# Altium PCB PCB01.PcbDoc
Units mil, origin at the board's own origin, x right, y up, seen from the top; angles counter-clockwise.
Board outline 3937.01 x 3937.01 mil, 4 copper layers (L1, L2, L3, L4), stack 61.855 mil thick; 75 components, 50 nets, 150 pads, 78 vias.
Unrouted connection lines stored in the file: 3.
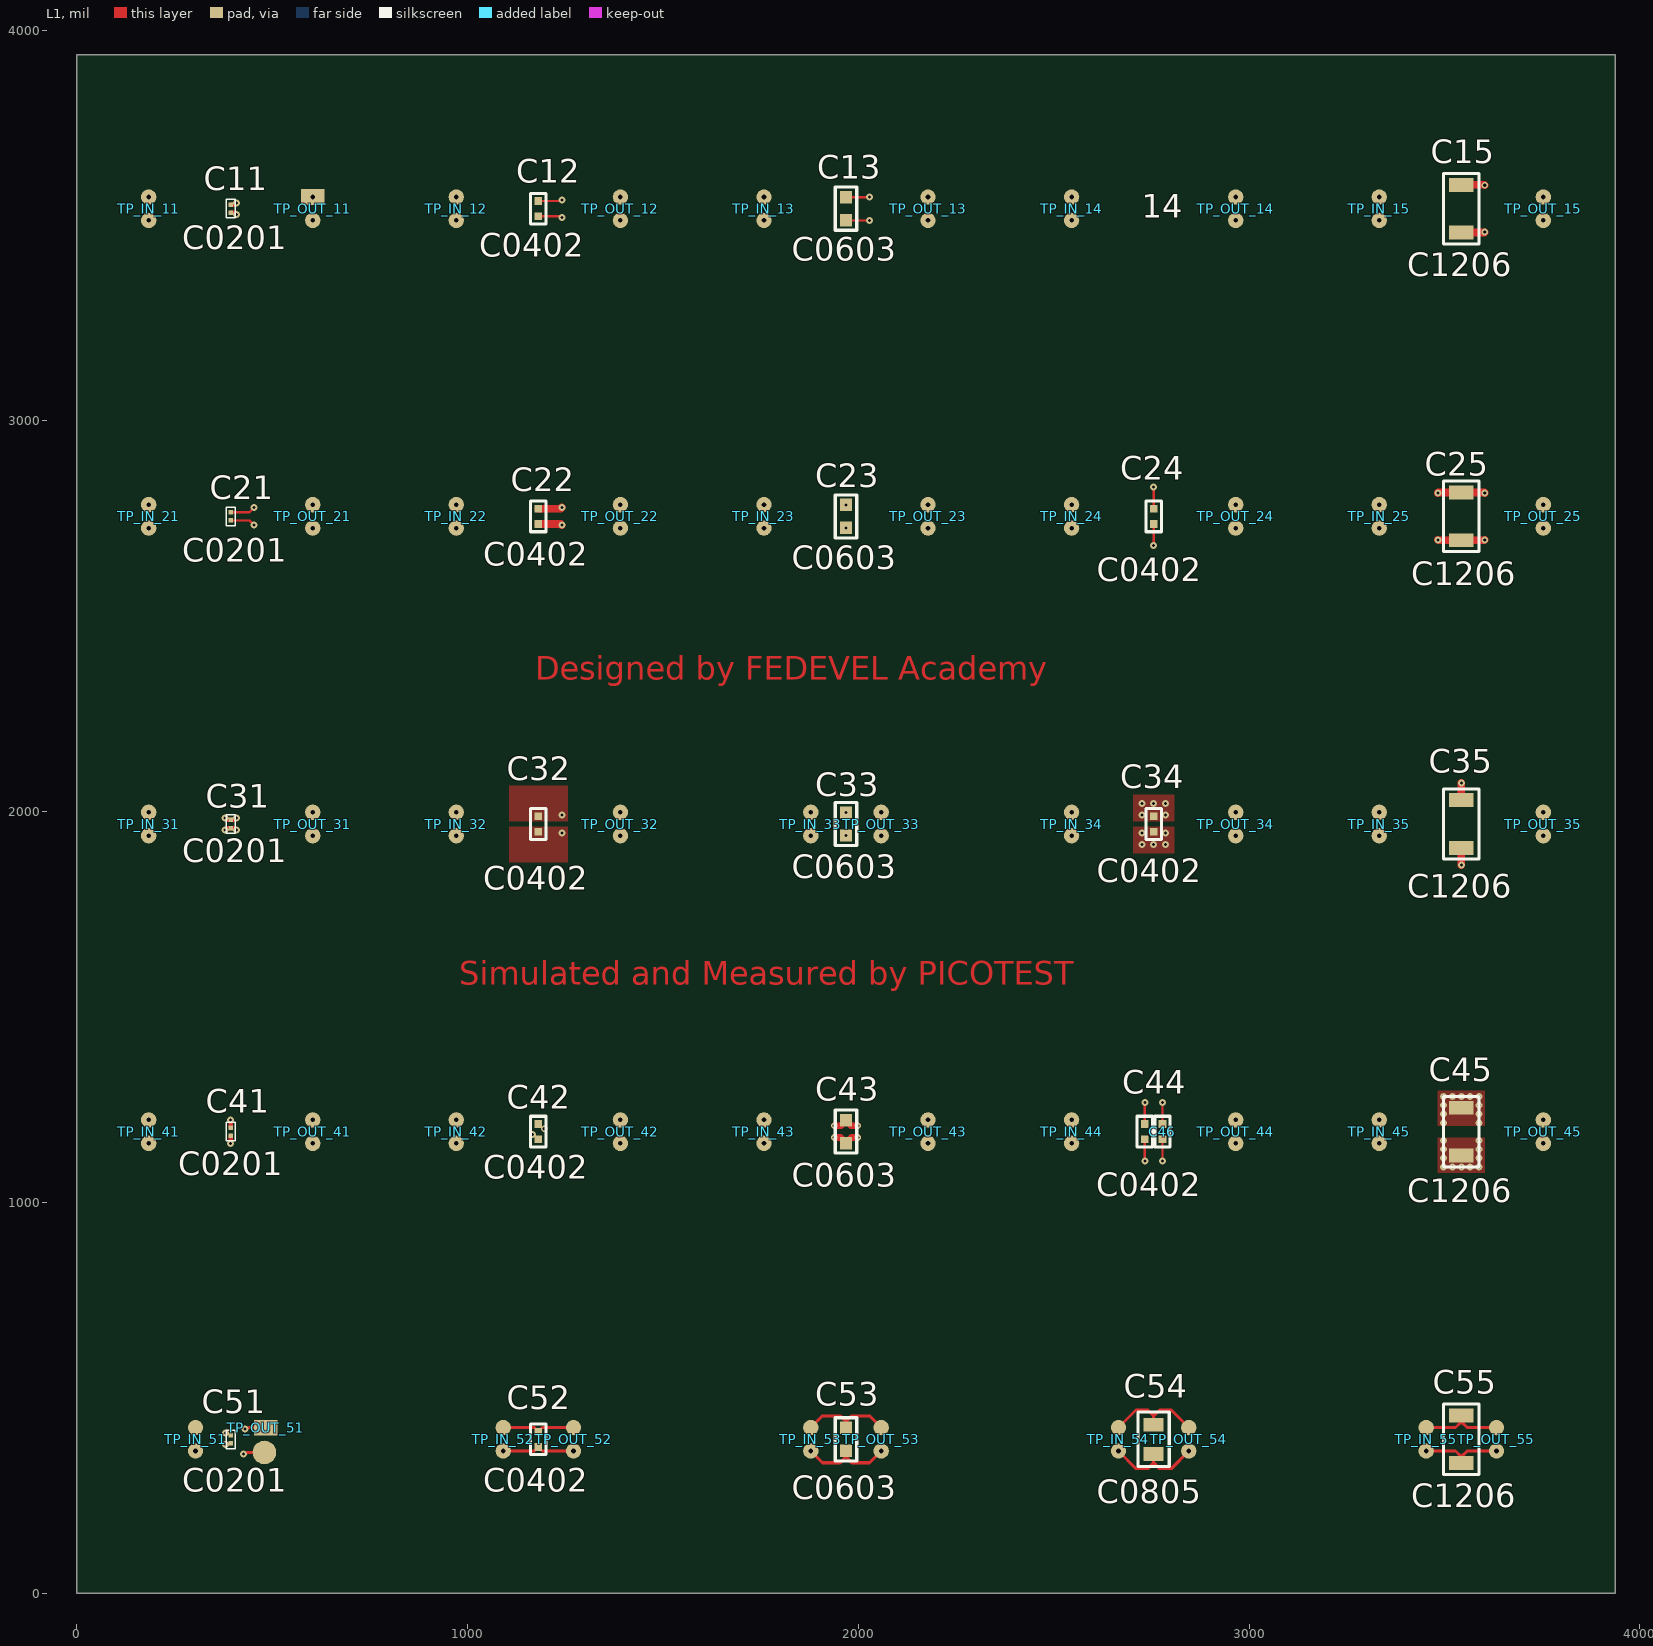
[diagram p0: L1 view]
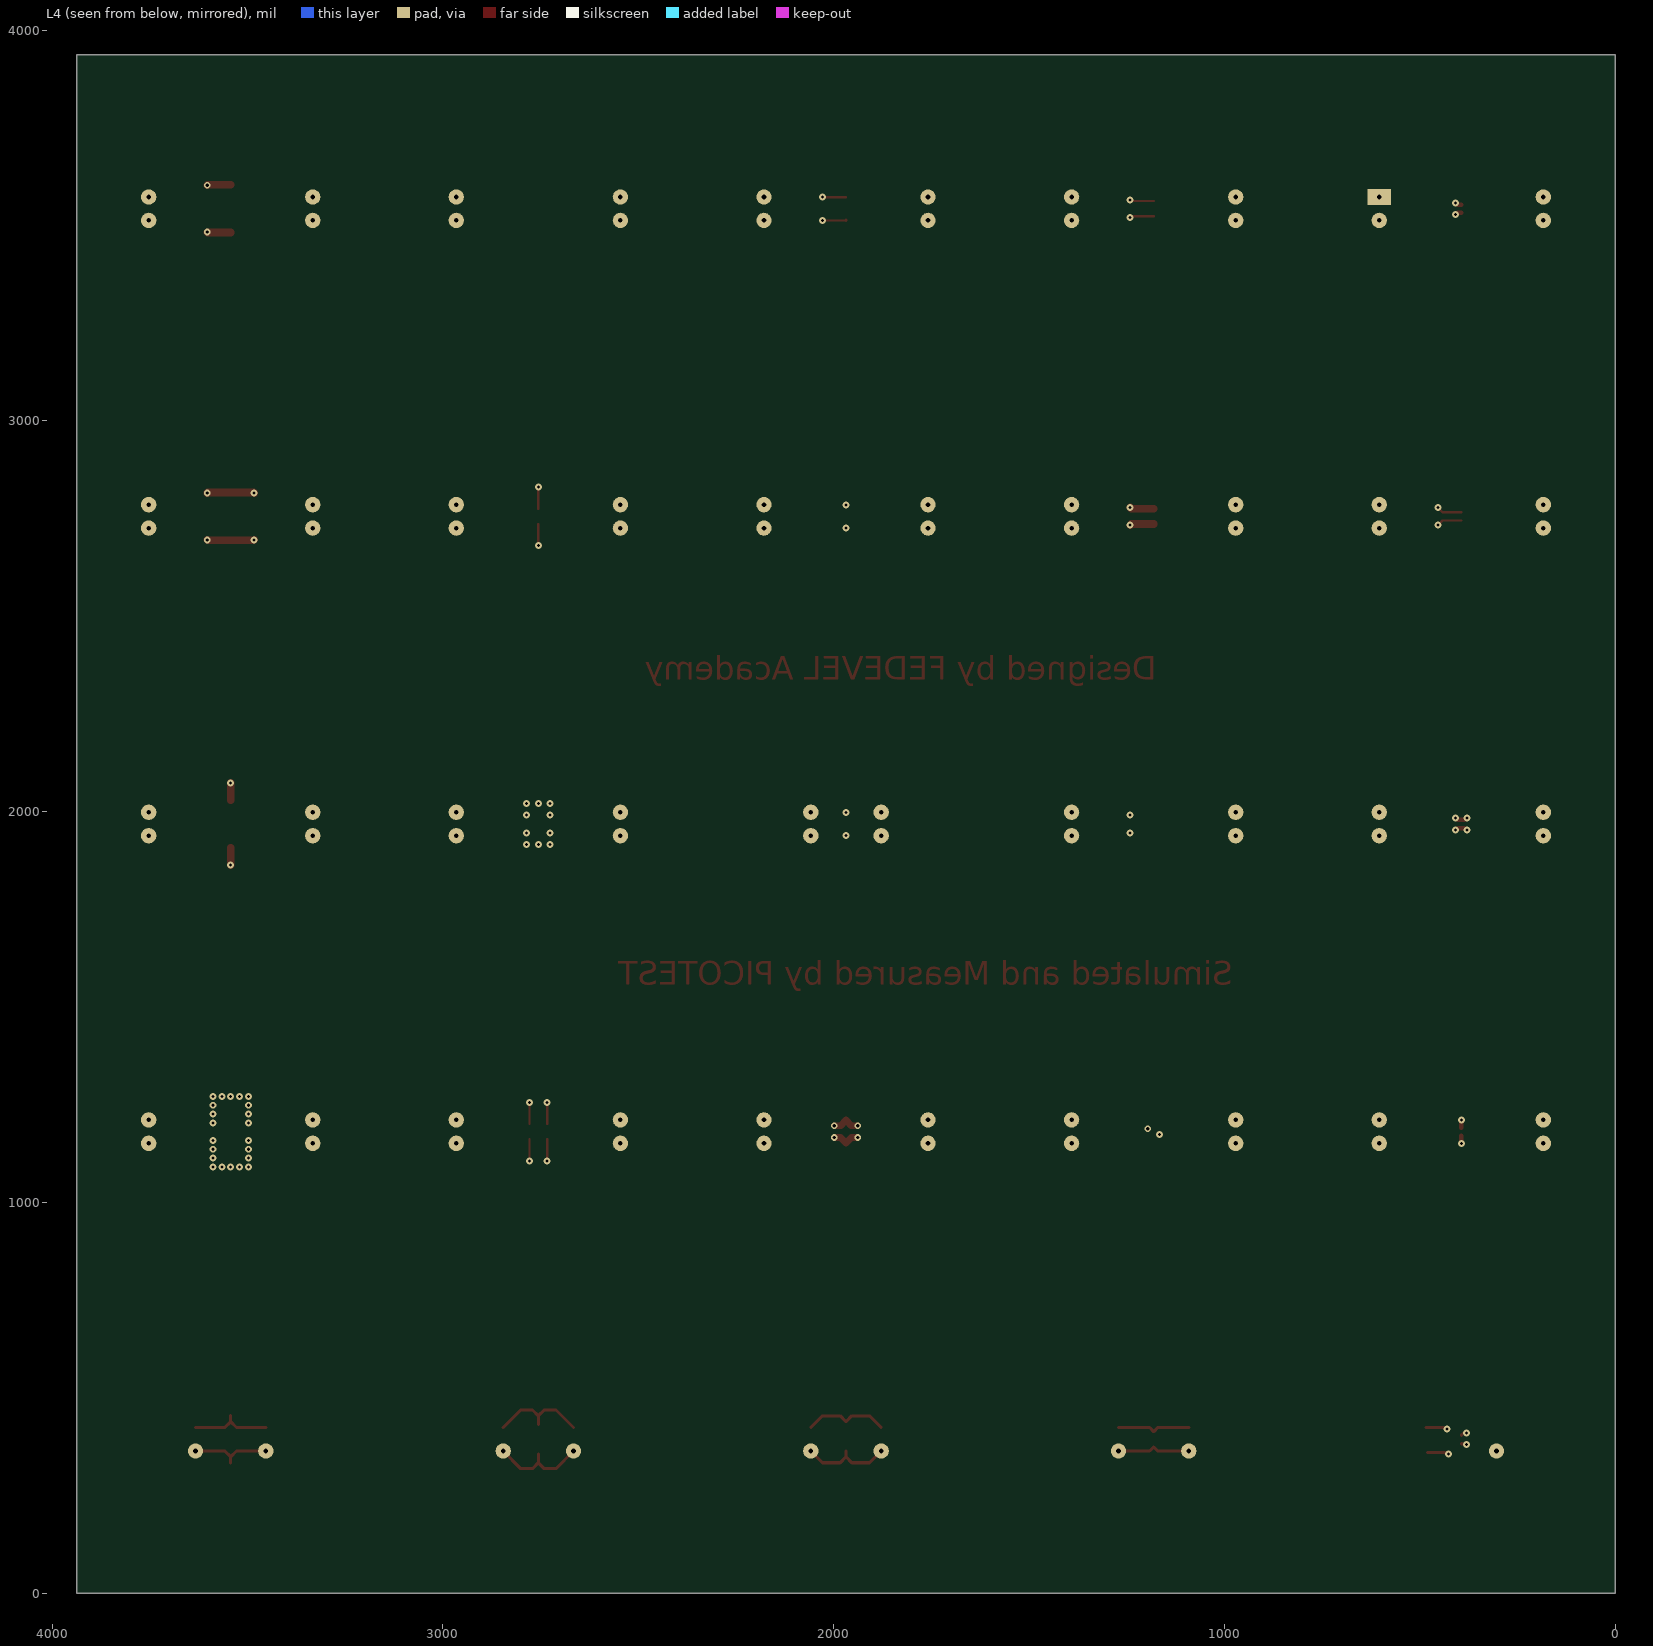
[diagram p1: L4 view, seen from below]
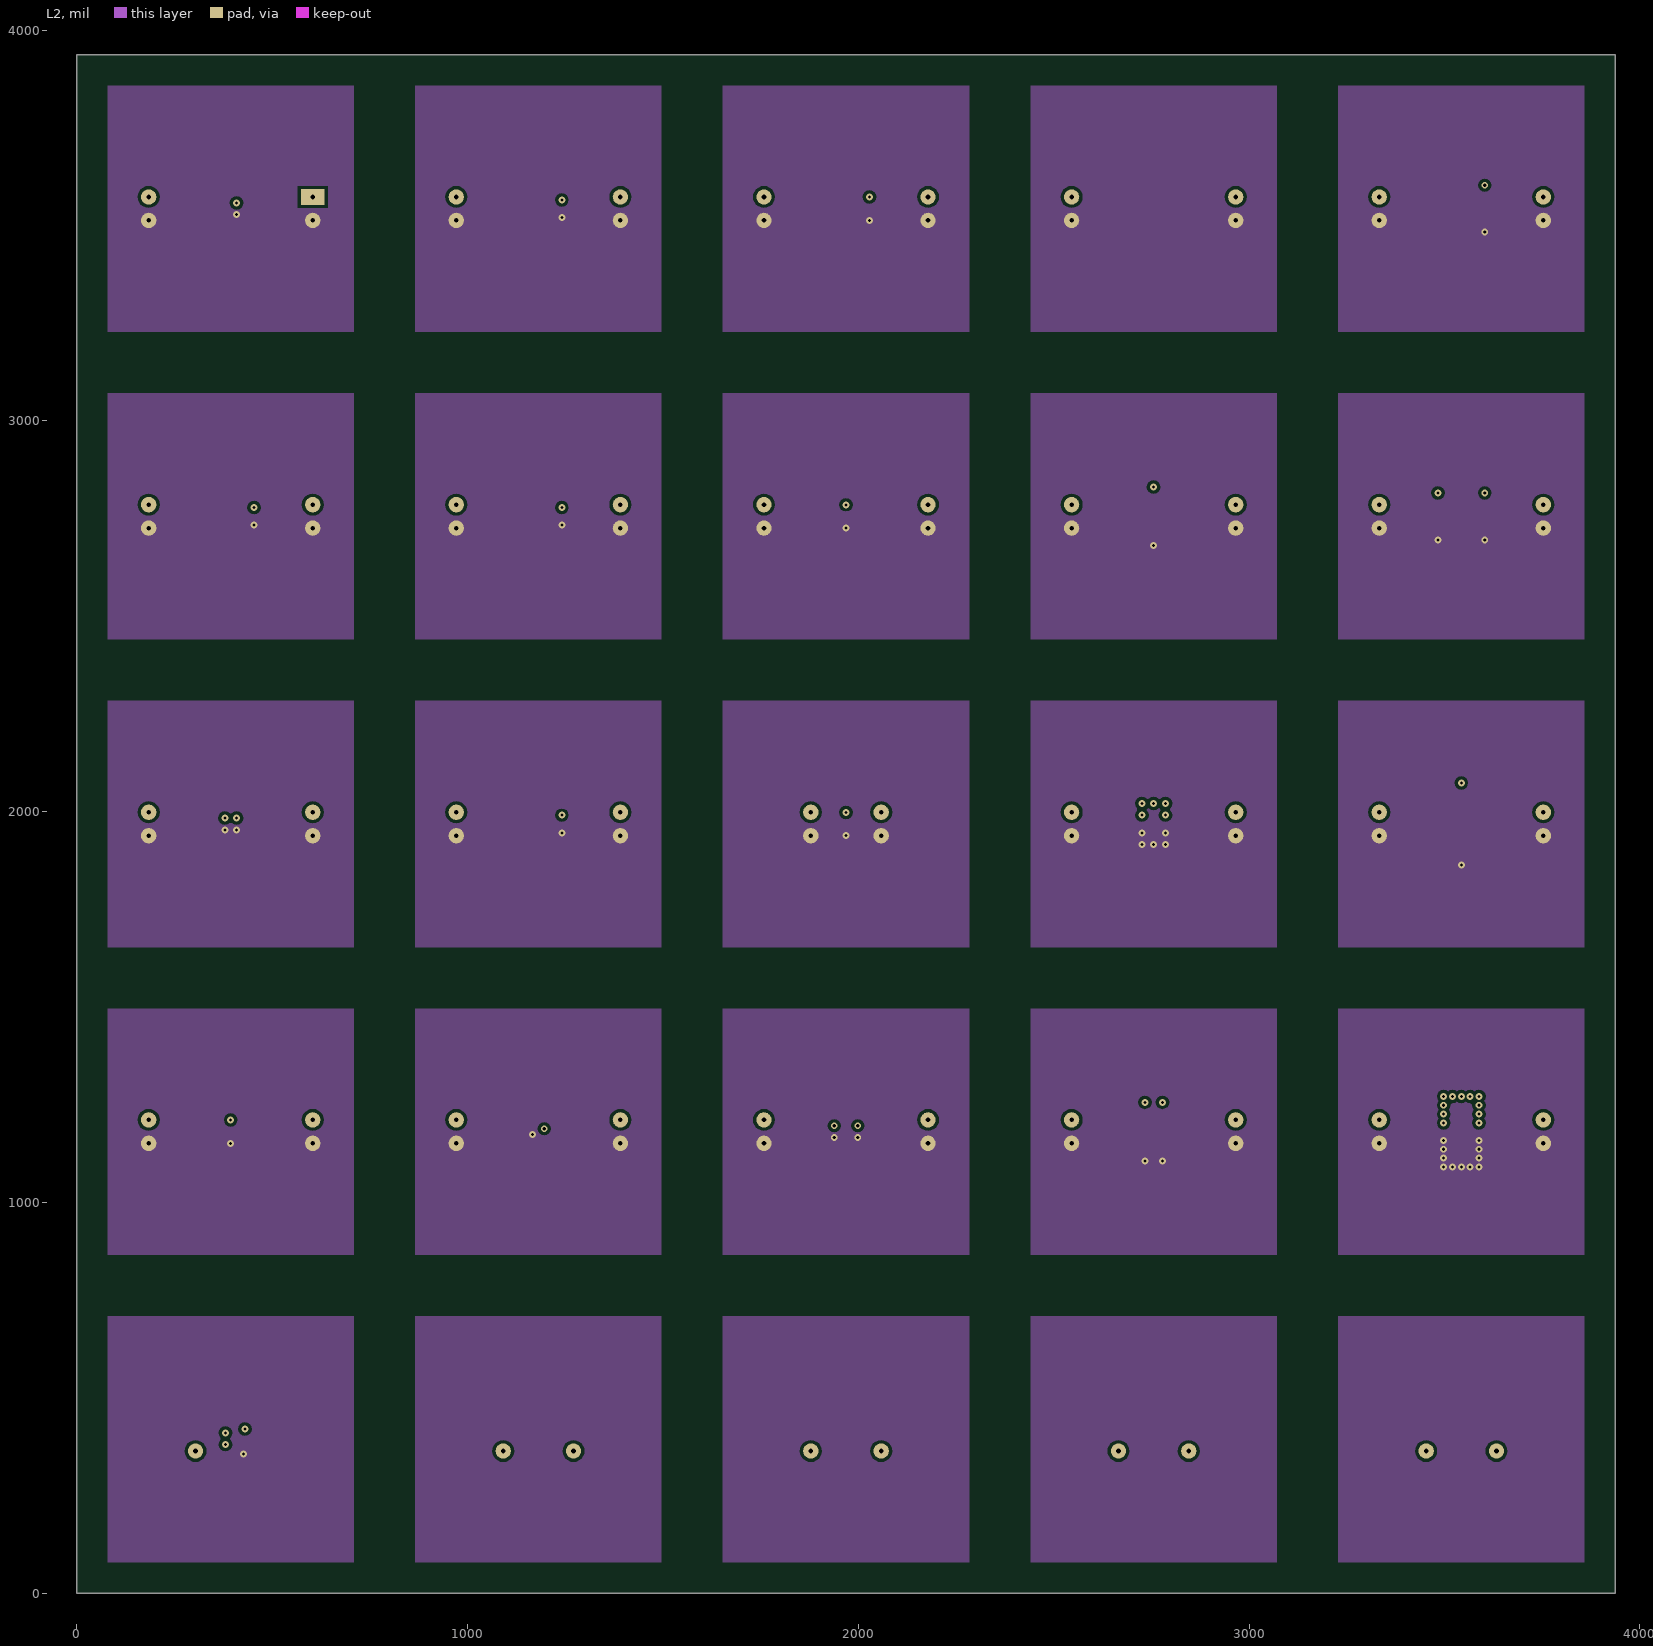
[diagram p2: L2]
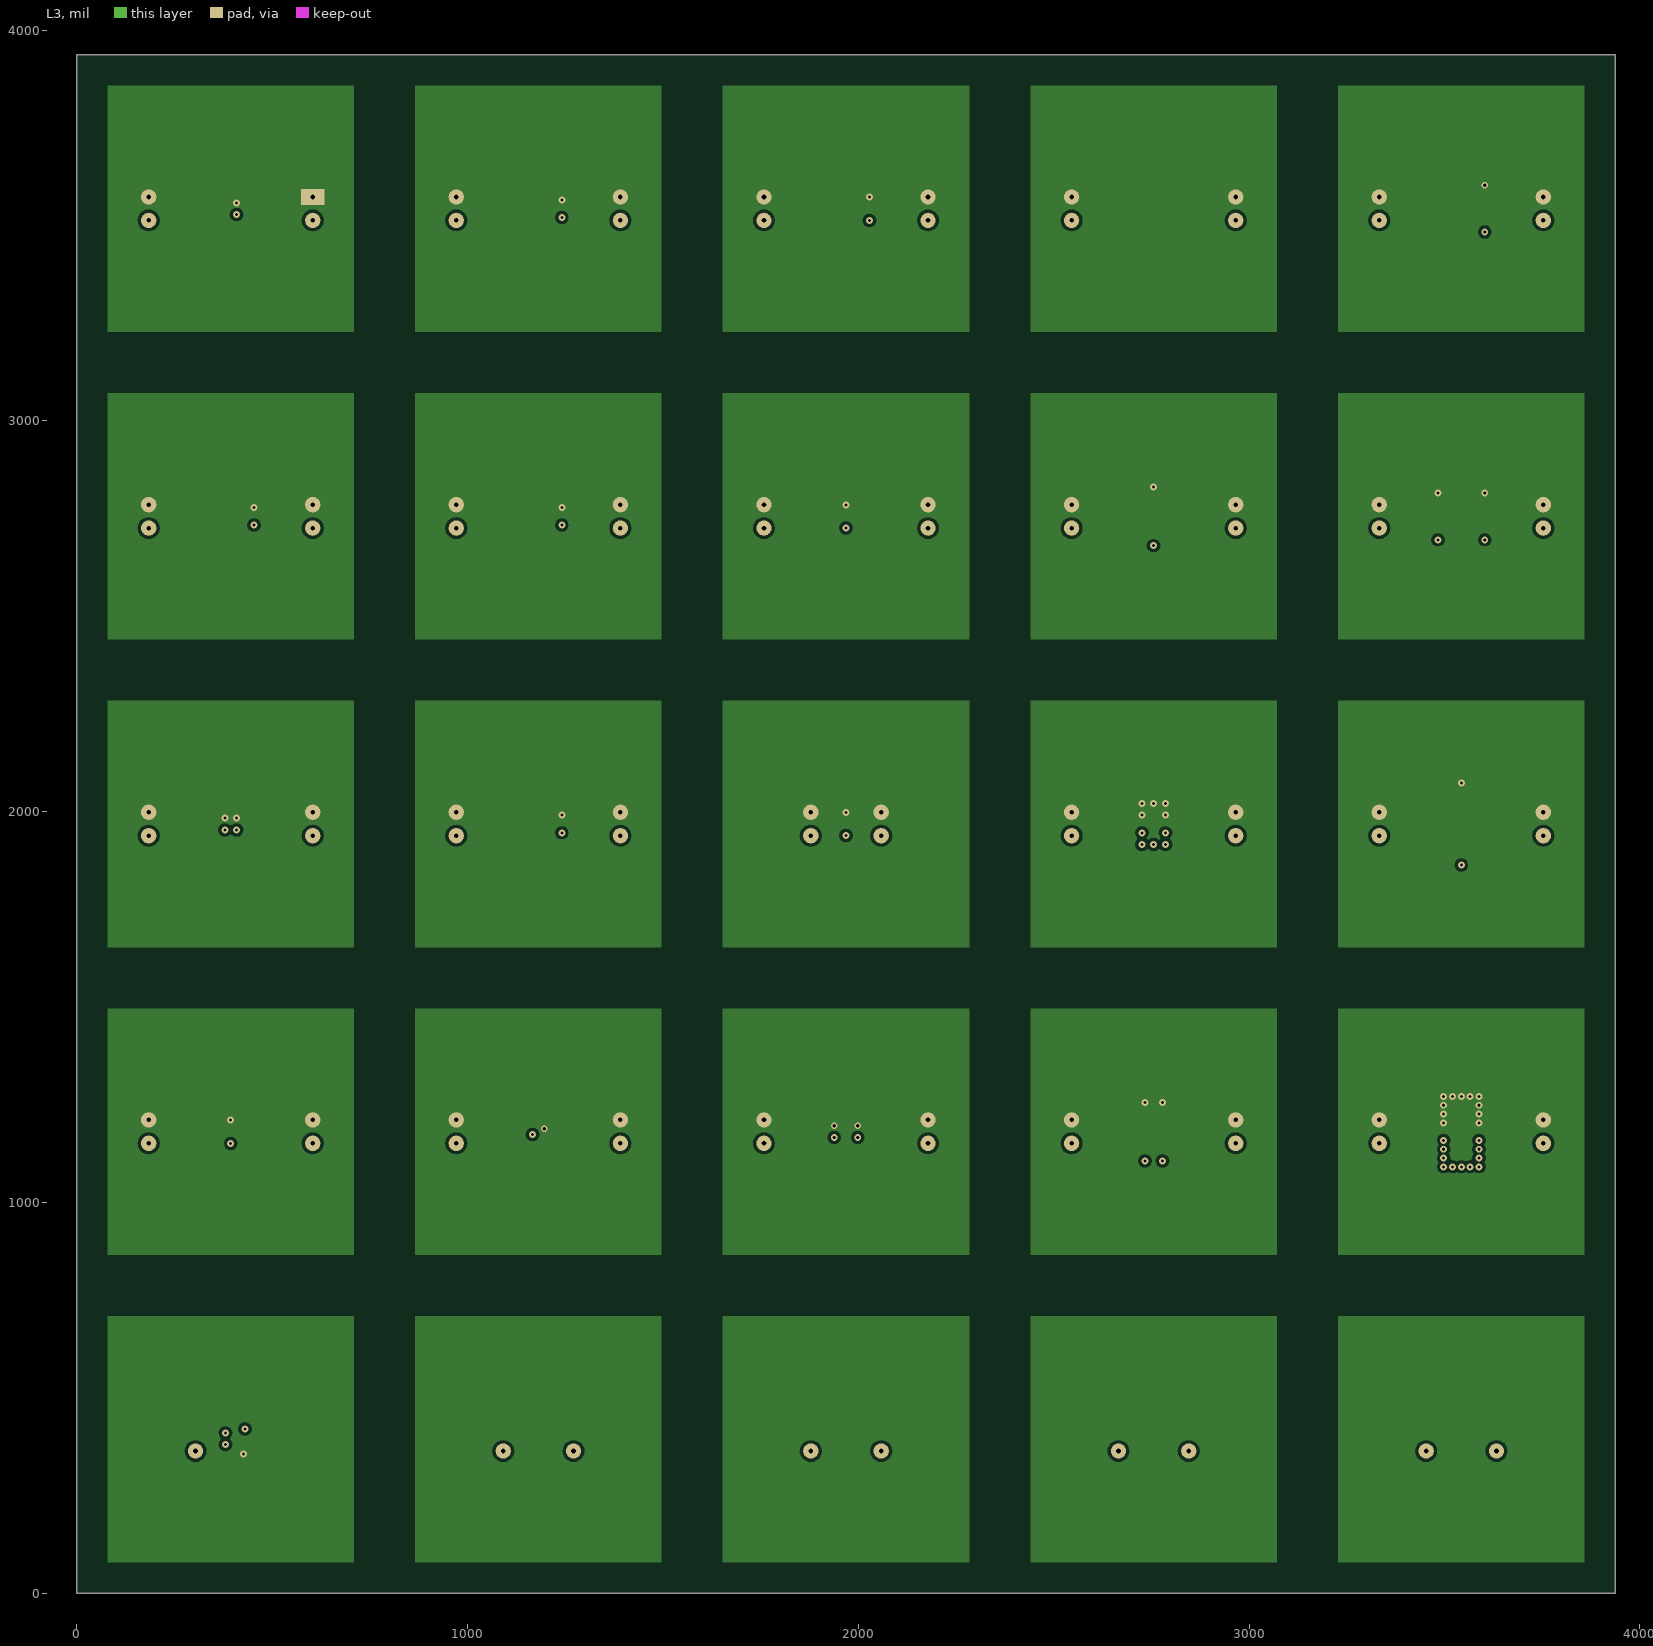
[diagram p3: L3]

## Layer stack, top to bottom
Top Solder: solder mask 0.5, Solder Resist, Dk 3.8
L1: signal copper 1.4
Dielectric 2: prepreg 3.937, 2313, Dk 4.05
L2: signal copper 0.689
Dielectric 1: dielectric 49.8031, FR-4, Dk 4.8
L3: signal copper 0.689
Dielectric 3: prepreg 3.937, 2313, Dk 4.05
L4: signal copper 1.4
Bottom Solder: solder mask 0.5, Solder Resist, Dk 3.8

## Board outline
0,0 3937.01,0 3937.01,3937.01 0,3937.01

## Design rules (kind name [scope] priority, off if disabled: settings)
Clearance [All] p1: gap=7.87 ignorepadtopadclearanceinfootprint=FALSE
HoleSize [All] p1: absolutevalues=TRUE maxlimit=250 minlimit=7.87 maxpercent=80.000 minpercent=20.000
MinimumSolderMaskSliver [All] p1: minsoldermaskwidth=7.87
PolygonConnect [All] p1: connectstyle=Direct reliefconductorwidth=10 reliefentries=4 polygonreliefangle="90 Angle" airgapwidth=10
RoutingVias [All] p1: holewidth=11.81 width=23.62 viastyle="Through Hole" minholewidth=7.87 minwidth=17.72 maxholewidth=250 maxwidth=393.7
SolderMaskExpansion [All] p1: expansion=1.97 istentingtop=FALSE
Width [All] p1: maxlimit=393.7 minlimit=5.91 preferedwidth=5.91
28 further rules are at their usual default settings.

## Components (designator, comment, footprint, x,y, rotation, side; value= is the part's Value field where it differs from the comment)
C11 "C0201" C0201 393.7,3543.31 r270 top
C12 "C0402" C0402 1181.1,3543.31 r270 top
C13 "C0603" C0603 1968.5,3543.31 r270 top
C15 "C1206" C1206 3543.31,3543.31 r270 top
C21 "C0201" C0201 393.7,2755.91 r270 top
C22 "C0402" C0402 1181.1,2755.91 r270 top
C23 "C0603" C0603 1968.5,2755.91 r270 top
C24 "C0402" C0402 2755.91,2755.91 r270 top
C25 "C1206" C1206 3543.31,2755.91 r270 top
C31 "C0201" C0201 393.7,1968.5 r270 top
C32 "C0402" C0402 1181.1,1968.5 r270 top
C33 "C0603" C0603 1968.5,1968.5 r270 top
C34 "C0402" C0402 2755.91,1968.5 r270 top
C35 "C1206" C1206 3543.31,1968.5 r270 top
C41 "C0201" C0201 393.7,1181.1 r270 top
C42 "C0402" C0402 1181.1,1181.1 r270 top
C43 "C0603" C0603 1968.5,1181.1 r270 top
C44 "C0402" C0402 2733.41,1181.1 r270 top
C45 "C1206" C1206 3543.31,1181.1 r270 top
C46 "C0402" C0402 2778.41,1181.1 r270 top
C51 "C0201" C0201 393.7,393.7 r270 top
C52 "C0402" C0402 1181.1,393.7 r270 top
C53 "C0603" C0603 1968.5,393.7 r270 top
C54 "C0805" C0805 2755.91,393.7 r270 top
C55 "C1206" C1206 3543.31,393.7 r270 top
TP_IN_11 "TH-TH" TP_TH_TH#1 183.7,3543.31 r0 top
TP_IN_12 "TH-TH" TP_TH_TH#1 971.1,3543.31 r0 top
TP_IN_13 "TH-TH" TP_TH_TH#1 1758.5,3543.31 r0 top
TP_IN_14 "TH-TH" TP_TH_TH#1 2545.91,3543.31 r0 top
TP_IN_15 "TH-TH" TP_TH_TH#1 3333.31,3543.31 r0 top
TP_IN_21 "TH-TH" TP_TH_TH#1 183.7,2755.91 r0 top
TP_IN_22 "TH-TH" TP_TH_TH#1 971.1,2755.91 r0 top
TP_IN_23 "TH-TH" TP_TH_TH#1 1758.5,2755.91 r0 top
TP_IN_24 "TH-TH" TP_TH_TH#1 2545.91,2755.91 r0 top
TP_IN_25 "TH-TH" TP_TH_TH#1 3333.31,2755.91 r0 top
TP_IN_31 "TH-TH" TP_TH_TH#1 183.7,1968.5 r0 top
TP_IN_32 "TH-TH" TP_TH_TH#1 971.1,1968.5 r0 top
TP_IN_33 "TH-TH" TP_TH_TH#1 1878.5,1968.5 r0 top
TP_IN_34 "TH-TH" TP_TH_TH#1 2545.91,1968.5 r0 top
TP_IN_35 "TH-TH" TP_TH_TH#1 3333.31,1968.5 r0 top
TP_IN_41 "TH-TH" TP_TH_TH#1 183.7,1181.1 r0 top
TP_IN_42 "TH-TH" TP_TH_TH#1 971.1,1181.1 r0 top
TP_IN_43 "TH-TH" TP_TH_TH#1 1758.5,1181.1 r0 top
TP_IN_44 "TH-TH" TP_TH_TH#1 2545.91,1181.1 r0 top
TP_IN_45 "TH-TH" TP_TH_TH#1 3333.31,1181.1 r0 top
TP_IN_51 "TOP-TH" TP_TOP_TH#1 303.7,393.7 r0 top
TP_IN_52 "TOP-TH" TP_TOP_TH#1 1091.1,393.7 r0 top
TP_IN_53 "TOP-TH" TP_TOP_TH#1 1878.5,393.7 r0 top
TP_IN_54 "TOP-TH" TP_TOP_TH#1 2665.91,393.7 r0 top
TP_IN_55 "TOP-TH" TP_TOP_TH#1 3453.31,393.7 r0 top
TP_OUT_11 "TH-TH" TP_TH_TH#2 603.7,3543.31 r0 top
TP_OUT_12 "TH-TH" TP_TH_TH#1 1391.1,3543.31 r0 top
TP_OUT_13 "TH-TH" TP_TH_TH#1 2178.5,3543.31 r0 top
TP_OUT_14 "TH-TH" TP_TH_TH#1 2965.91,3543.31 r0 top
TP_OUT_15 "TH-TH" TP_TH_TH#1 3753.31,3543.31 r0 top
TP_OUT_21 "TH-TH" TP_TH_TH#1 603.7,2755.91 r0 top
TP_OUT_22 "TH-TH" TP_TH_TH#1 1391.1,2755.91 r0 top
TP_OUT_23 "TH-TH" TP_TH_TH#1 2178.5,2755.91 r0 top
TP_OUT_24 "TH-TH" TP_TH_TH#1 2965.91,2755.91 r0 top
TP_OUT_25 "TH-TH" TP_TH_TH#1 3753.31,2755.91 r0 top
TP_OUT_31 "TH-TH" TP_TH_TH#1 603.7,1968.5 r0 top
TP_OUT_32 "TH-TH" TP_TH_TH#1 1391.1,1968.5 r0 top
TP_OUT_33 "TH-TH" TP_TH_TH#1 2058.5,1968.5 r0 top
TP_OUT_34 "TH-TH" TP_TH_TH#1 2965.91,1968.5 r0 top
TP_OUT_35 "TH-TH" TP_TH_TH#1 3753.31,1968.5 r0 top
TP_OUT_41 "TH-TH" TP_TH_TH#1 603.7,1181.1 r0 top
TP_OUT_42 "TH-TH" TP_TH_TH#1 1391.1,1181.1 r0 top
TP_OUT_43 "TH-TH" TP_TH_TH#1 2178.5,1181.1 r0 top
TP_OUT_44 "TH-TH" TP_TH_TH#1 2965.91,1181.1 r0 top
TP_OUT_45 "TH-TH" TP_TH_TH#1 3753.31,1181.1 r0 top
TP_OUT_51 "TOP-TH" TP_TOP_TH#2 483.7,393.7 r0 top
TP_OUT_52 "TOP-TH" TP_TOP_TH#1 1271.1,393.7 r0 top
TP_OUT_53 "TOP-TH" TP_TOP_TH#1 2058.5,393.7 r0 top
TP_OUT_54 "TOP-TH" TP_TOP_TH#1 2845.91,393.7 r0 top
TP_OUT_55 "TOP-TH" TP_TOP_TH#1 3633.31,393.7 r0 top

## Footprints (in the part's own frame and the unit in brackets; to place one, negate y for a bottom-side part, rotate by r counter-clockwise, add the part's x,y. Pads: shape width x height; smd on the part's side, far side on the other; paste and mask are expansions set on the pad)
C0201 [mm] "Creator MM"
  rect 0.3x0.3 smd mask+0.04: 1(-0.265,0) 2(0.265,0)
  silkscreen extent -0.6,-0.3 0.6,0.3, body extent -0.3,-0.15 0.3,0.15, height 0.3
C0402 [mm]
  rect 0.5x0.5 smd: 1(-0.5,0) 2(0.5,0)
  silkscreen extent -1,-0.5 1,0.5, body extent -0.5,-0.25 0.5,0.25, height 0.56
C0603 [mm]
  rect 0.8x0.8 smd: 1(-0.75,0) 2(0.75,0)
  silkscreen extent -1.4,-0.7 1.4,0.7, body extent -0.8,-0.42 0.8,0.44, height 0.95
C0805 [mm]
  rect 0.9x1.3 smd: 1(-0.95,0) 2(0.95,0)
  silkscreen extent -1.78,-1.02 1.78,1.02, body extent -1,-0.6 1,0.6, height 1.5
C1206 [mm]
  rect 0.9x1.6 smd: 1(-1.55,0) 2(1.55,0)
  silkscreen extent -2.29,-1.14 2.29,1.14, body extent -1.6,-0.8 1.6,0.8, height 1.8
TP_TH_TH#1 [mm]
  round 1 hole 0.3: 1(0,0.762) 2(0,-0.762)
TP_TH_TH#2 [mm]
  rect 1.524x1.016 hole 0.3: 1(0,0.762)
  round 1 hole 0.3: 2(0,-0.762)
TP_TOP_TH#1 [mm]
  round 1 smd: 1(0,0.762)
  round 1 hole 0.3: 2(0,-0.762)
TP_TOP_TH#2 [mm]
  rect 1.524x1.016 smd: 1(0,0.762)

## Part data
C11 C21 C31 C41 C51: library part CAP0201
C12 C22 C24 C32 C34 C42 C44 C46 C52: library part CAP0402
C13 C23 C33 C43 C53: library part CAP0603
C15 C25 C35 C45 C55: library part CAP1206
C54: library part CAP0805
TP_IN_11 TP_IN_12 TP_IN_13 TP_IN_14 TP_IN_15 TP_IN_21 TP_IN_22 TP_IN_23 TP_IN_24 TP_IN_25 TP_IN_31 TP_IN_32 TP_IN_33 TP_IN_34 TP_IN_35 TP_IN_41 TP_IN_42 TP_IN_43 TP_IN_44 TP_IN_45 TP_OUT_11 TP_OUT_12 TP_OUT_13 TP_OUT_14 TP_OUT_15 TP_OUT_21 TP_OUT_22 TP_OUT_23 TP_OUT_24 TP_OUT_25 TP_OUT_31 TP_OUT_32 TP_OUT_33 TP_OUT_34 TP_OUT_35 TP_OUT_41 TP_OUT_42 TP_OUT_43 TP_OUT_44 TP_OUT_45: library part TP_TH_TH, "Testpoints TH - TH 1mm/0.3mm"
TP_IN_51 TP_IN_52 TP_IN_53 TP_IN_54 TP_IN_55 TP_OUT_51 TP_OUT_52 TP_OUT_53 TP_OUT_54 TP_OUT_55: library part TP_TOP_TH, "Testpoints TOP - TH 1mm/0.3mm"

## Free pads (board coordinates)
  round 60 smd: 2(480,360)

## Via types
v1: diameter 17.72, hole 7.87, L1 to L4, 78 vias

## Nets (pads, with @x,y where several pads share a name; then routed paths per layer and width w, separated by ;. In a path a pad name is that pad's centre, name@x,y a point inside that pad or via, vN(x,y) a via of type N, cw(c..) or ccw(c..) an arc to the next point about the centre after c; other vN are vias at no path point)
+VCC11: C11.1 TP_IN_11.1 TP_OUT_11.1 | length 16.9
  L1 w11.81: C11.1 402.54,3553.74 407.1,3558.31 v1(408.7,3558.31)
+VCC12: C12.1 TP_IN_12.1 TP_OUT_12.1 | length 61.2
  L1 w5.91: C12.1 1235.09,3562.99 1237.91,3565.81 v1(1241.1,3565.81)
+VCC13: C13.1 TP_IN_13.1 TP_OUT_13.1 | length 59.5
  L1 w5.91: C13.1 v1@2028.03,3572.83
  other v1: 2028.5,3573.31
+VCC14: TP_IN_14.1 TP_OUT_14.1
+VCC15: C15.1 TP_IN_15.1 TP_OUT_15.1 | length 60.4
  L1 w19.68: C15.1 3602.28,3604.33 v1(3603.31,3603.31)
+VCC21: C21.1 TP_IN_21.1 TP_OUT_21.1 | length 65
  L1 w5.91: C21.1 441.63,2766.34 v1(453.7,2778.41)
+VCC22: C22.1 TP_IN_22.1 TP_OUT_22.1 | length 61.2
  L1 w19.68: C22.1 1238.29,2775.59 v1(1241.1,2778.41)
+VCC23: C23.1 TP_IN_23.1 TP_OUT_23.1
  other v1: 1968.5,2785.43
+VCC24: C24.1 TP_IN_24.1 TP_OUT_24.1 | length 55.3
  L1 w5.91: C24.1 v1(2755.91,2830.91)
+VCC25: C25.1 TP_IN_25.1 TP_OUT_25.1 | length 120.8
  L1 w19.68: v1(3483.31,2815.91) 3484.33,2816.93 C25.1 3602.28,2816.93 v1(3603.31,2815.91)
+VCC31: C31.1 TP_IN_31.1 TP_OUT_31.1 | length 33.8
  L1 w11.81: v1(378.7,1983.5) 380.3,1983.5 384.87,1978.94 C31.1 402.54,1978.94 407.1,1983.5 v1(408.7,1983.5)
+VCC32: C32.1 TP_IN_32.1 TP_OUT_32.1
  other v1: 1241.1,1991
+VCC33: C33.1 TP_IN_33.1 TP_OUT_33.1
  other v1: 1968.5,1998.03
+VCC34: C34.1 TP_IN_34.1 TP_OUT_34.1
  other v1: 2725.91,1991 2785.91,1991 2725.91,2021 2755.91,2021 2785.91,2021
+VCC35: C35.1 TP_IN_35.1 TP_OUT_35.1 | length 44
  L1 w19.68: C35.1 v1(3543.31,2073.5)
+VCC41: C41.1 TP_IN_41.1 TP_OUT_41.1 | length 19.6
  L1 w11.81: C41.1 v1(393.7,1211.1)
+VCC42: C42.1 TP_IN_42.1 TP_OUT_42.1
  other v1: 1196.1,1188.6
+VCC43: C43.1 TP_IN_43.1 TP_OUT_43.1 | length 72
  L1 w17.72: v1(1938.5,1196.1) 1953.98,1196.1 C43.1 1983.03,1196.1 v1(1998.5,1196.1)
+VCC44: C44.1 C46.1 TP_IN_44.1 TP_OUT_44.1 | length 110.6
  L1 w5.91: C44.1 v1(2733.41,1256.1) ; C46.1 v1(2778.41,1256.1)
+VCC45: C45.1 TP_IN_45.1 TP_OUT_45.1
  other v1: 3498.31,1203.6 3588.31,1203.6 3498.31,1226.1 3588.31,1226.1 3498.31,1248.6 3588.31,1248.6 3498.31,1271.1 3520.81,1271.1 3543.31,1271.1 3565.81,1271.1 3588.31,1271.1
+VCC51: C51.1 TP_IN_51.1 TP_OUT_51.1 | length 71.4
  L1 w7.87: v1(380,410) 387.83,410 C51.1 ; v1(430,420) 431.88,421.88 437.72,421.88 439.53,423.7 TP_OUT_51.1
+VCC52: C52.1 TP_IN_52.1 TP_OUT_52.1 | length 188.5
  L1 w7.87: TP_IN_52.1 1170.79,423.7 C52.1 1191.42,423.7 TP_OUT_52.1
+VCC53: C53.1 TP_IN_53.1 TP_OUT_53.1 | length 217.3
  L1 w7.87: TP_IN_53.1 1908.5,453.7 1953.5,453.7 1968.5,438.7 1983.5,453.7 2028.5,453.7 TP_OUT_53.1
+VCC54: C54.1 TP_IN_54.1 TP_OUT_54.1 | length 252.3
  L1 w7.87: TP_IN_54.1 2710.91,468.7 2740.91,468.7 2755.91,453.7 ; C54.1 2755.91,453.7 ; TP_OUT_54.1 2800.91,468.7 2770.91,468.7 2755.91,453.7
+VCC55: C55.1 TP_IN_55.1 TP_OUT_55.1 | length 208.5
  L1 w7.87: TP_IN_55.1 3528.31,423.7 C55.1@3543.31,438.7 ; C55.1 C55.1@3543.31,438.7 ; TP_OUT_55.1 3558.31,423.7 C55.1@3543.31,438.7
GND11: C11.2 TP_IN_11.2 TP_OUT_11.2 | length 16.9
  L1 w11.81: C11.2 402.54,3532.87 407.1,3528.31 v1(408.7,3528.31)
GND12: C12.2 TP_IN_12.2 TP_OUT_12.2 | length 61.2
  L1 w5.91: C12.2 1235.09,3523.62 1237.91,3520.81 v1(1241.1,3520.81)
GND13: C13.2 TP_IN_13.2 TP_OUT_13.2 | length 60.2
  L1 w5.91: C13.2@1968.98,3513.31 v1(2028.5,3513.31)
  L1 w7.87: C13.2 C13.2@1968.98,3513.31
GND14: TP_IN_14.2 TP_OUT_14.2
GND15: C15.2 TP_IN_15.2 TP_OUT_15.2 | length 60.4
  L1 w19.68: C15.2 3602.28,3482.28 v1(3603.31,3483.31)
GND21: C21.2 TP_IN_21.2 TP_OUT_21.2 | length 65
  L1 w5.91: C21.2 441.63,2745.47 v1(453.7,2733.41)
GND22: C22.2 TP_IN_22.2 TP_OUT_22.2 | length 61.2
  L1 w19.68: C22.2 1238.29,2736.22 v1(1241.1,2733.41)
GND23: C23.2 TP_IN_23.2 TP_OUT_23.2
  other v1: 1968.5,2726.38
GND24: C24.2 TP_IN_24.2 TP_OUT_24.2 | length 55.3
  L1 w5.91: v1(2755.91,2680.91) C24.2
GND25: C25.2 TP_IN_25.2 TP_OUT_25.2 | length 120.8
  L1 w19.68: v1(3483.31,2695.91) 3484.33,2694.88 C25.2 3602.28,2694.88 v1(3603.31,2695.91)
GND31: C31.2 TP_IN_31.2 TP_OUT_31.2 | length 33.8
  L1 w11.81: v1(378.7,1953.5) 380.3,1953.5 384.87,1958.07 C31.2 402.54,1958.07 407.1,1953.5 v1(408.7,1953.5)
GND32: C32.2 TP_IN_32.2 TP_OUT_32.2
  other v1: 1241.1,1946
GND33: C33.2 TP_IN_33.2 TP_OUT_33.2
  other v1: 1968.5,1938.98
GND34: C34.2 TP_IN_34.2 TP_OUT_34.2
  other v1: 2725.91,1916 2755.91,1916 2785.91,1916 2725.91,1946 2785.91,1946
GND35: C35.2 TP_IN_35.2 TP_OUT_35.2 | length 44
  L1 w19.68: v1(3543.31,1863.5) C35.2
GND41: C41.2 TP_IN_41.2 TP_OUT_41.2 | length 19.6
  L1 w11.81: v1(393.7,1151.1) C41.2
GND42: C42.2 TP_IN_42.2 TP_OUT_42.2
  other v1: 1166.1,1173.6
GND43: C43.2 TP_IN_43.2 TP_OUT_43.2 | length 72
  L1 w17.72: v1(1938.5,1166.1) 1953.98,1166.1 C43.2 1983.03,1166.1 v1(1998.5,1166.1)
GND44: C44.2 C46.2 TP_IN_44.2 TP_OUT_44.2 | length 110.6
  L1 w5.91: v1(2733.41,1106.1) C44.2 ; v1(2778.41,1106.1) C46.2
GND45: C45.2 TP_IN_45.2 TP_OUT_45.2
  other v1: 3498.31,1091.1 3520.81,1091.1 3543.31,1091.1 3565.81,1091.1 3588.31,1091.1 3498.31,1113.6 3588.31,1113.6 3498.31,1136.1 3588.31,1136.1 3498.31,1158.6 3588.31,1158.6
GND51: C51.2 TP_IN_51.2 | length 15.1
  L1 w7.87: v1(380,380) 382.1,382.1 392.53,382.1 C51.2
GND52: C52.2 TP_IN_52.2 TP_OUT_52.2 | length 188.5
  L1 w7.87: TP_IN_52.2 1170.79,363.7 C52.2 1191.42,363.7 TP_OUT_52.2
GND53: C53.2 TP_IN_53.2 TP_OUT_53.2 | length 232.8
  L1 w7.87: TP_IN_53.2 1908.5,333.7 1953.5,333.7 C53.2@1968.5,348.7 ; C53.2 C53.2@1968.5,348.7 ; TP_OUT_53.2 2028.5,333.7 1983.5,333.7 C53.2@1968.5,348.7
GND54: C54.2 TP_IN_54.2 TP_OUT_54.2 | length 252.3
  L1 w7.87: TP_IN_54.2 2710.91,318.7 2740.91,318.7 2755.91,333.7 ; C54.2 2755.91,333.7 ; TP_OUT_54.2 2800.91,318.7 2770.91,318.7 2755.91,333.7
GND55: C55.2 TP_IN_55.2 TP_OUT_55.2 | length 208.5
  L1 w7.87: TP_IN_55.2 3528.31,363.7 C55.2@3543.31,348.7 ; C55.2 C55.2@3543.31,348.7 ; TP_OUT_55.2 3558.31,363.7 C55.2@3543.31,348.7
copper on no net: | length 55.2
  L1 w7.87: v1(426.3,356.3) 428.18,358.18 434.02,358.18 435.83,360 480,360

## Polygon pours and split planes (outlines as drawn)
no net on L2 "NONET_L02_P048" (solid, pour order 48): 78.74,708.66 708.66,708.66 708.66,78.74 78.74,78.74
no net on L2 "NONET_L02_P046" (solid, pour order 46): 866.14,708.66 1496.06,708.66 1496.06,78.74 866.14,78.74
no net on L2 "NONET_L02_P044" (solid, pour order 44): 1653.54,708.66 2283.46,708.66 2283.46,78.74 1653.54,78.74
no net on L2 "NONET_L02_P042" (solid, pour order 42): 2440.94,708.66 3070.87,708.66 3070.87,78.74 2440.94,78.74
no net on L2 "NONET_L02_P040" (solid, pour order 40): 3228.35,708.66 3858.27,708.66 3858.27,78.74 3228.35,78.74
GND45 on L2 "GND45_L02_P038" (solid, pour order 38): 3228.35,1496.06 3858.27,1496.06 3858.27,866.14 3228.35,866.14
GND43 on L2 "GND43_L02_P034" (solid, pour order 34): 1653.54,1496.06 2283.46,1496.06 2283.46,866.14 1653.54,866.14
GND42 on L2 "GND42_L02_P032" (solid, pour order 32): 866.14,1496.06 1496.06,1496.06 1496.06,866.14 866.14,866.14
GND41 on L2 "GND41_L02_P030" (solid, pour order 30): 78.74,1496.06 708.66,1496.06 708.66,866.14 78.74,866.14
GND35 on L2 "GND35_L02_P028" (solid, pour order 28): 3228.35,2283.46 3858.27,2283.46 3858.27,1653.54 3228.35,1653.54
GND34 on L2 "GND34_L02_P026" (solid, pour order 26): 2440.94,2283.46 3070.87,2283.46 3070.87,1653.54 2440.94,1653.54
GND33 on L2 "GND33_L02_P024" (solid, pour order 24): 1653.54,2283.46 2283.46,2283.46 2283.46,1653.54 1653.54,1653.54
GND32 on L2 "GND32_L02_P022" (solid, pour order 22): 866.14,2283.46 1496.06,2283.46 1496.06,1653.54 866.14,1653.54
GND31 on L2 "GND31_L02_P020" (solid, pour order 20): 78.74,2283.46 708.66,2283.46 708.66,1653.54 78.74,1653.54
GND23 on L2 "GND23_L02_P014" (solid, pour order 14): 1653.54,3070.87 2283.46,3070.87 2283.46,2440.94 1653.54,2440.94
GND22 on L2 "GND22_L02_P012" (solid, pour order 12): 866.14,3070.87 1496.06,3070.87 1496.06,2440.94 866.14,2440.94
GND21 on L2 "GND21_L02_P010" (solid, pour order 10): 78.74,3070.87 708.66,3070.87 708.66,2440.94 78.74,2440.94
GND15 on L2 "GND15_L02_P008" (solid, pour order 8): 3228.35,3858.27 3858.27,3858.27 3858.27,3228.35 3228.35,3228.35
GND13 on L2 "GND13_L02_P004" (solid, pour order 4): 1653.54,3858.27 2283.46,3858.27 2283.46,3228.35 1653.54,3228.35
GND12 on L2 "GND12_L02_P002" (solid, pour order 2): 866.14,3858.27 1496.06,3858.27 1496.06,3228.35 866.14,3228.35
GND11 on L2 "GND11_L02_P000" (solid, pour order 0): 78.74,3858.27 708.66,3858.27 708.66,3228.35 78.74,3228.35
GND44 on L2 "GND44_L02_P036" (solid, pour order 36): 2440.94,1496.06 3070.87,1496.06 3070.87,866.14 2440.94,866.14
GND25 on L2 "GND25_L02_P018" (solid, pour order 18): 3228.35,3070.87 3858.27,3070.87 3858.27,2440.94 3228.35,2440.94
GND24 on L2 "GND24_L02_P016" (solid, pour order 16): 2440.94,3070.87 3070.87,3070.87 3070.87,2440.94 2440.94,2440.94
GND14 on L2 "GND14_L02_P006" (solid, pour order 6): 2440.94,3858.27 3070.87,3858.27 3070.87,3228.35 2440.94,3228.35
no net on L3 "NONET_L03_P049" (solid, pour order 49): 78.74,708.66 708.66,708.66 708.66,78.74 78.74,78.74
no net on L3 "NONET_L03_P047" (solid, pour order 47): 866.14,708.66 1496.06,708.66 1496.06,78.74 866.14,78.74
no net on L3 "NONET_L03_P045" (solid, pour order 45): 1653.54,708.66 2283.46,708.66 2283.46,78.74 1653.54,78.74
no net on L3 "NONET_L03_P043" (solid, pour order 43): 2440.94,708.66 3070.87,708.66 3070.87,78.74 2440.94,78.74
no net on L3 "NONET_L03_P041" (solid, pour order 41): 3228.35,708.66 3858.27,708.66 3858.27,78.74 3228.35,78.74
+VCC45 on L3 "+VCC45_L03_P039" (solid, pour order 39): 3228.35,1496.06 3858.27,1496.06 3858.27,866.14 3228.35,866.14
+VCC43 on L3 "+VCC43_L03_P035" (solid, pour order 35): 1653.54,1496.06 2283.46,1496.06 2283.46,866.14 1653.54,866.14
+VCC42 on L3 "+VCC42_L03_P033" (solid, pour order 33): 866.14,1496.06 1496.06,1496.06 1496.06,866.14 866.14,866.14
+VCC41 on L3 "+VCC41_L03_P031" (solid, pour order 31): 78.74,1496.06 708.66,1496.06 708.66,866.14 78.74,866.14
+VCC35 on L3 "+VCC35_L03_P029" (solid, pour order 29): 3228.35,2283.46 3858.27,2283.46 3858.27,1653.54 3228.35,1653.54
+VCC34 on L3 "+VCC34_L03_P027" (solid, pour order 27): 2440.94,2283.46 3070.87,2283.46 3070.87,1653.54 2440.94,1653.54
+VCC33 on L3 "+VCC33_L03_P025" (solid, pour order 25): 1653.54,2283.46 2283.46,2283.46 2283.46,1653.54 1653.54,1653.54
+VCC32 on L3 "+VCC32_L03_P023" (solid, pour order 23): 866.14,2283.46 1496.06,2283.46 1496.06,1653.54 866.14,1653.54
+VCC31 on L3 "+VCC31_L03_P021" (solid, pour order 21): 78.74,2283.46 708.66,2283.46 708.66,1653.54 78.74,1653.54
+VCC23 on L3 "+VCC23_L03_P015" (solid, pour order 15): 1653.54,3070.87 2283.46,3070.87 2283.46,2440.94 1653.54,2440.94
+VCC22 on L3 "+VCC22_L03_P013" (solid, pour order 13): 866.14,3070.87 1496.06,3070.87 1496.06,2440.94 866.14,2440.94
+VCC21 on L3 "+VCC21_L03_P011" (solid, pour order 11): 78.74,3070.87 708.66,3070.87 708.66,2440.94 78.74,2440.94
+VCC15 on L3 "+VCC15_L03_P009" (solid, pour order 9): 3228.35,3858.27 3858.27,3858.27 3858.27,3228.35 3228.35,3228.35
+VCC13 on L3 "+VCC13_L03_P005" (solid, pour order 5): 1653.54,3858.27 2283.46,3858.27 2283.46,3228.35 1653.54,3228.35
+VCC12 on L3 "+VCC12_L03_P003" (solid, pour order 3): 866.14,3858.27 1496.06,3858.27 1496.06,3228.35 866.14,3228.35
+VCC11 on L3 "+VCC11_L03_P001" (solid, pour order 1): 78.74,3858.27 708.66,3858.27 708.66,3228.35 78.74,3228.35
+VCC44 on L3 "+VCC44_L03_P037" (solid, pour order 37): 2440.94,1496.06 3070.87,1496.06 3070.87,866.14 2440.94,866.14
+VCC25 on L3 "+VCC25_L03_P019" (solid, pour order 19): 3228.35,3070.87 3858.27,3070.87 3858.27,2440.94 3228.35,2440.94
+VCC24 on L3 "+VCC24_L03_P017" (solid, pour order 17): 2440.94,3070.87 3070.87,3070.87 3070.87,2440.94 2440.94,2440.94
+VCC14 on L3 "+VCC14_L03_P007" (solid, pour order 7): 2440.94,3858.27 3070.87,3858.27 3070.87,3228.35 2440.94,3228.35
GND45 on L1 "GND45_L01_P058" (solid, pour order 58): 3603.31,1166.1 3483.31,1166.1 3483.31,1076.1 3603.31,1076.1
+VCC45 on L1 "+VCC45_L01_P057" (solid, pour order 57): 3483.31,1196.1 3603.31,1196.1 3603.31,1286.1 3483.31,1286.1
GND34 on L1 "GND34_L01_P056" (solid, pour order 56): 2808.41,1961 2703.41,1961 2703.41,1893.5 2808.41,1893.5
+VCC34 on L1 "+VCC34_L01_P055" (solid, pour order 55): 2808.41,1976 2703.41,1976 2703.41,2043.5 2808.41,2043.5
GND32 on L1 "GND32_L01_P052" (solid, pour order 52): 1256.1,1961 1106.1,1961 1106.1,1871 1256.1,1871
+VCC32 on L1 "+VCC32_L01_P050" (solid, pour order 50): 1256.1,1976 1106.1,1976 1106.1,2066 1256.1,2066

## Other copper
L1:
  text "Designed by FEDEVEL Academy" at 1173.76,2338.02 h60
  text "Simulated and Measured by PICOTEST" at 978.82,1556.99 h60

## Silkscreen, mask and mechanical layers (free items; w line width, h text height)
Top Overlay:
  text "14" at 2725.01,3520.01 h60